# Altium PCB PE_CAM_EZ_Bridge.PcbDoc
Units mm, origin at the board's own origin, x right, y up, seen from the top; angles counter-clockwise.
Board outline 56 x 59.87 mm, 2 copper layers (Top Layer, Bottom Layer), stack 1.671 mm thick; 31 components, 35 nets, 226 pads, 470 vias.
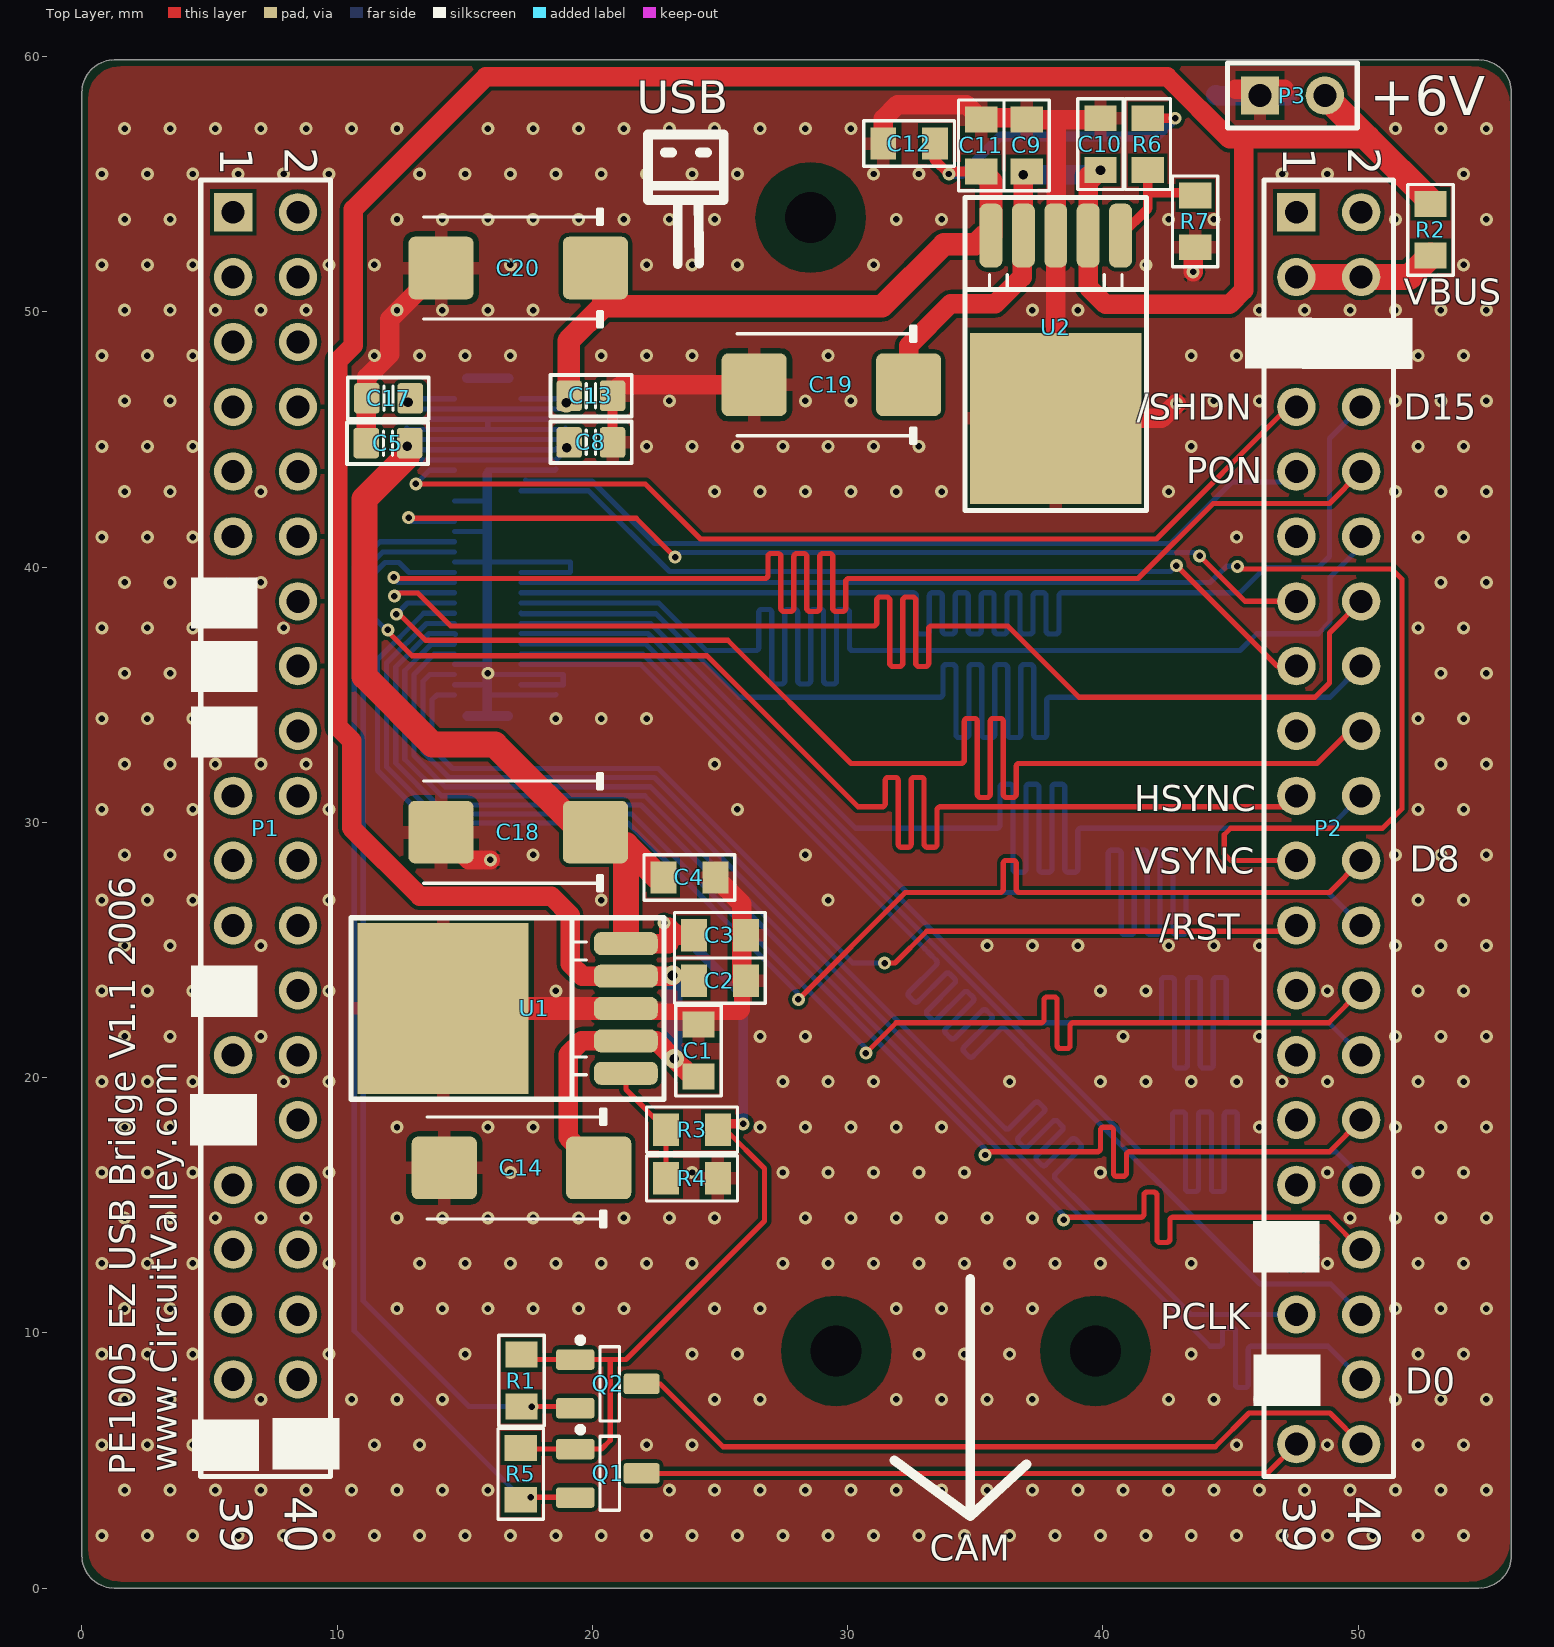
[diagram p0: Top Layer view]
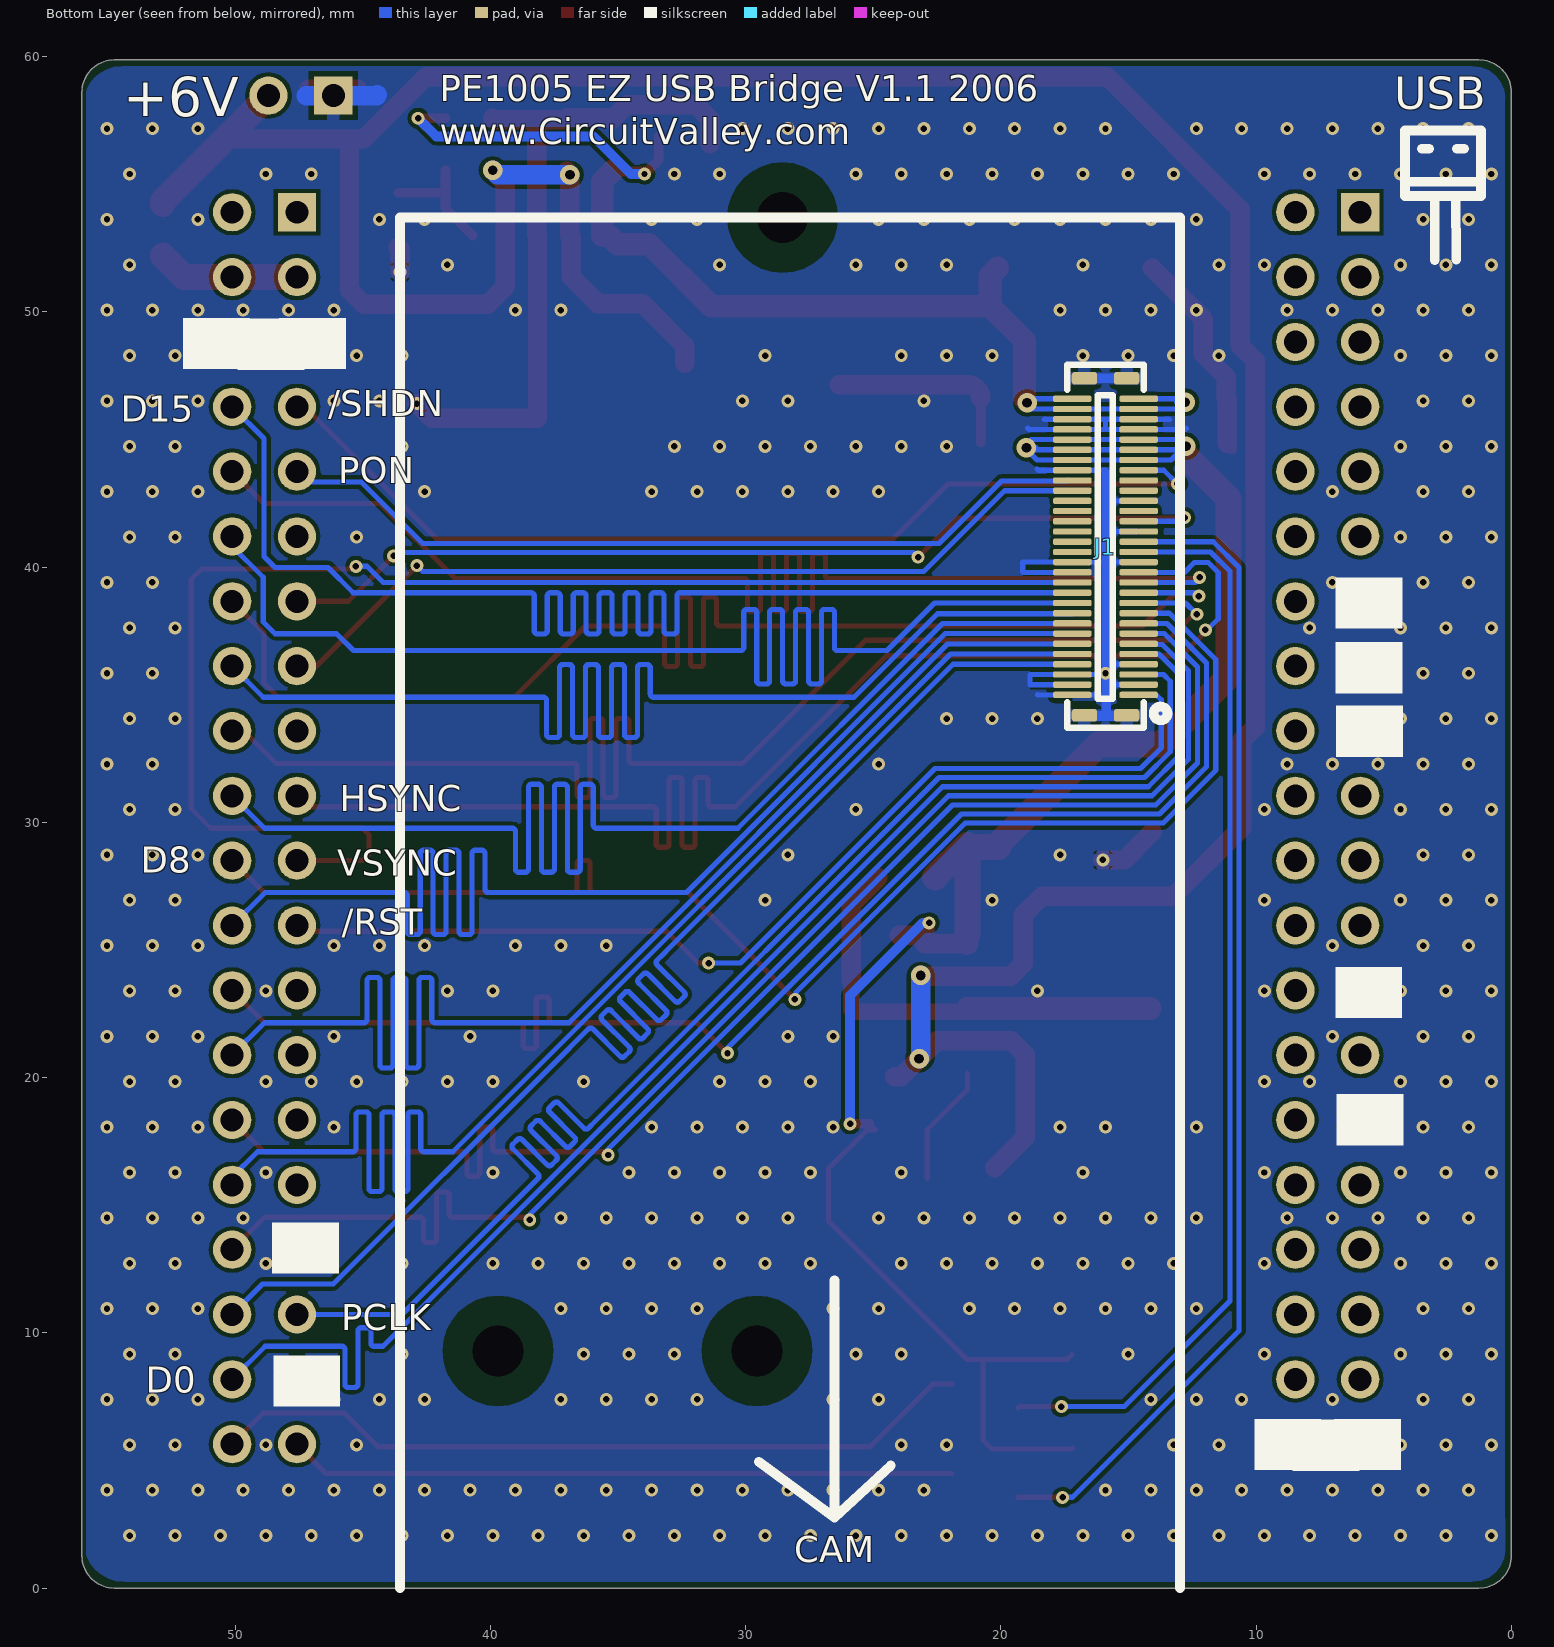
[diagram p1: Bottom Layer view, seen from below]

## Layer stack, top to bottom
Top Solder: solder mask 0.0102, Solder Resist, Dk 3.5
Top Layer: signal copper 0.0356
Dielectric 1: dielectric 1.6, FR-4, Dk 4.8
Bottom Layer: signal copper 0.0356
Bottom Solder: solder mask 0.0102, Solder Resist, Dk 3.5

## Board outline
0,1.27 0,58.598 cw(c1.27,58.598) 1.27,59.868 54.73,59.868 cw(c54.73,58.598) 56,58.598 56,1.27 cw(c54.73,1.27) 54.73,0 1.27,0 cw(c1.27,1.27)

## Design rules (kind name [scope] priority, off if disabled: settings)
Clearance [All] p1: gap=0.152
MatchedLengths [InNetClass('VID')] p1: tolerance=0.025 checknetsindiffpair=TRUE checkdiffpairvsdiffpair=TRUE checkothers=TRUE
PolygonConnect [All] p1: connectstyle=Relief reliefconductorwidth=0.508 reliefentries=4 polygonreliefangle="90 Angle" airgapwidth=0.203
RoutingVias [All] p1: holewidth=0.254 width=0.508 viastyle="Through Hole" minholewidth=0.254 minwidth=0.508 maxholewidth=1.016 maxwidth=2.54
SolderMaskExpansion [All] p1: expansion=0.102
Width [All] p1: maxlimit=6.35 minlimit=0.152 preferedwidth=0.254
30 further rules are at their usual default settings.

## Classes and differential pairs
net class VID: HSYNC PCLK VSYN YC0 YC1 YC2 YC3 YC4 YC5 YC6 YC7 YC8 YC9 YC10 YC11 YC12 YC13 YC14 YC15

## Components (designator, comment, footprint, x,y, rotation, side; value= is the part's Value field where it differs from the comment)
C1 "1uf" 0805C-TBD 24.155,20.295 r90 top
C2 "1uf" 0805C-TBD 24.232,23.8 r0 top
C3 "1uf" 0805C-TBD 24.232,25.578 r0 top
C4 "1uf" 0805C-TBD 23.038,27.838 r0 top
C5 "100n" CAPC1608N 11.989,44.856 r180 top
C8 "100n" CAPC1608N 19.939,44.882 r0 top
C9 "1uf" 0805C-TBD 37.008,55.753 r90 top
C10 "1uf" 0805C-TBD 39.903,55.804 r90 top
C11 "1uf" 0805C-TBD 35.23,55.753 r90 top
C12 "1uf" 0805C-TBD 33.172,56.591 r180 top
C13 "100n" CAPC1608N 19.939,46.711 r0 top
C14 "33uf 20V D" CAPMP7343X310N 17.221,16.459 r180 top
C17 "100n" CAPC1608N 12.014,46.609 r180 top
C18 "33uf 20V D" CAPMP7343X310N 17.094,29.616 r180 top
C19 "33uf 20V D" CAPMP7343X310N 29.362,47.142 r180 top
C20 "33uf 20V D" CAPMP7343X310N 17.094,51.714 r180 top
J1 "AXT460124" AXT460124 15.9,40.792 r90 bottom
P1 "Header 20X2" HDR2X20 5.925,53.899 r270 top
P2 "Header 20X2" HDR2X20 47.574,53.899 r270 top
P3 "Header 2" HDR1X2 46.152,58.471 r0 top
Q1 "NTR5103NT1G" SOT23-3 20.676,4.496 r0 top
Q2 "NTR5103NT1G" SOT23-3 20.676,8.001 r0 top
R1 "3.2K" 0805R-5K6 17.221,8.89 r270 top
R2 "0R" 0805R-5K6 52.832,52.451 r90 top
R3 "3.3K" 0805R-5K6 23.139,17.958 r0 top
R4 "1.5K" 0805R-5K6 23.139,16.053 r0 top
R5 "3.2K" 0805R-5K6 17.194,3.715 r90 top
R6 "?" 0805R-5K6 41.758,55.804 r90 top
R7 "1K" 0805R-5K6 43.612,54.305 r270 top
U1 "MIC47xxx" "TO-252-5 DPAK 5" 17.501,22.708 r180 top
U2 "MIC47xxx" "TO-252-5 DPAK 5" 38.151,49.174 r270 top

## Footprints (in the part's own frame and the unit in brackets; to place one, negate y for a bottom-side part, rotate by r counter-clockwise, add the part's x,y. Pads: shape width x height; smd on the part's side, far side on the other; paste and mask are expansions set on the pad)
0805C-TBD [mil] "CAPACITOR 0805"
  rect 40x50 smd: 1(-10,0) 2(70,0)
  silkscreen extent -40,-35 100,35, body extent -11,-25 70,25, height 26
0805R-5K6 [mil] "RESISTOR 0805"
  rect 40x50 smd: 1(-10,0) 2(70,0)
  silkscreen extent -40,-35 100,35, body extent -11,-25 70,25, height 27
AXT460124 [mm] "PE Camera Connector Header type"
  rrect50% 0.5x1 smd: 0(-6.6,-0.825) 0(-6.6,0.825) 0(6.6,-0.825) 0(6.6,0.825)
  rrect50% 0.247x1.5 smd: 1(-5.8,-1.3) 2(-5.4,-1.3) 3(-5,-1.3) 4(-4.6,-1.3) 5(-4.2,-1.3) 6(-3.8,-1.3) 7(-3.4,-1.3) 8(-3,-1.3) 9(-2.6,-1.3) 10(-2.2,-1.3) 11(-1.8,-1.3) 12(-1.4,-1.3) 13(-1,-1.3) 14(-0.6,-1.3) 15(-0.2,-1.3) 16(0.2,-1.3) 17(0.6,-1.3) 18(1,-1.3) 19(1.4,-1.3) 20(1.8,-1.3) 21(2.2,-1.3) 22(2.6,-1.3) 23(3,-1.3) 24(3.4,-1.3) 25(3.8,-1.3) 26(4.2,-1.3) 27(4.6,-1.3) 28(5,-1.3) 29(5.4,-1.3) 30(5.8,-1.3) 31(5.8,1.3) 32(5.4,1.3) 33(5,1.3) 34(4.6,1.3) 35(4.2,1.3) 36(3.8,1.3) 37(3.4,1.3) 38(3,1.3) 39(2.6,1.3) 40(2.2,1.3) 41(1.8,1.3) 42(1.4,1.3) 43(1,1.3) 44(0.6,1.3) 45(0.2,1.3) 46(-0.2,1.3) 47(-0.6,1.3) 48(-1,1.3) 49(-1.4,1.3) 50(-1.8,1.3) 51(-2.2,1.3) 52(-2.6,1.3) 53(-3,1.3) 54(-3.4,1.3) 55(-3.8,1.3) 56(-4.2,1.3) 57(-4.6,1.3) 58(-5,1.3) 59(-5.4,1.3) 60(-5.8,1.3)
  silkscreen extent -7.09,-2.43 7.14,1.5, body extent -6.95,-1.17 6.95,1.17, height 1.24
CAPC1608N [mm] "Chip Capacitor, Body 1.6x0.8mm, 0603, IPC Medium Density"
  round 0.254 on Mech14: 0(0,0)
  rrect25% 1x1.2 smd: 1(-0.85,0) 2(0.85,0)
  Top Layer pour cut-out: -0.4,0.6 0.4,0.6 0.4,-0.6 -0.4,-0.6
  silkscreen extent -1.57,-0.81 1.6,0.81, body extent -0.85,-0.45 0.85,0.45, height 0.89
CAPMP7343X310N [mm] "Molded body capacitor, Body 7.3x4.3mm, 2917, IPC Nominal settings"
  round 1 on Mech14: 0(0,0)
  rrect20% 2.55x2.45 smd: 1(-3.025,0) 2(3.025,0)
  silkscreen extent -3.3,-2.3 3.7,2.3, body extent -3.8,-1.97 3.8,1.98, height 3.1
HDR1X2 [mm] "Connector; Header; 2 Position"
  rect 1.5x1.5 hole 0.9: 1(0,0)
  round 1.5 hole 0.9: 2(2.54,0)
  silkscreen extent -1.27,-1.27 3.81,1.27
HDR2X20 [mm] "Connector; Header; 20x2 Position"
  rect 1.5x1.5 hole 0.9: 1(0,0)
  round 1.5 hole 0.9: 2(0,2.54) 3(2.54,0) 4(2.54,2.54) 5(5.08,0) 6(5.08,2.54) 7(7.62,0) 8(7.62,2.54) 9(10.16,0) 10(10.16,2.54) 11(12.7,0) 12(12.7,2.54) 13(15.24,0) 14(15.24,2.54) 15(17.78,0) 16(17.78,2.54) 17(20.32,0) 18(20.32,2.54) 19(22.86,0) 20(22.86,2.54) 21(25.4,0) 22(25.4,2.54) 23(27.94,0) 24(27.94,2.54) 25(30.48,0) 26(30.48,2.54) 27(33.02,0) 28(33.02,2.54) 29(35.56,0) 30(35.56,2.54) 31(38.1,0) 32(38.1,2.54) 33(40.64,0) 34(40.64,2.54) 35(43.18,0) 36(43.18,2.54) 37(45.72,0) 38(45.72,2.54) 39(48.26,0) 40(48.26,2.54)
  silkscreen extent -1.27,-1.27 49.53,3.81
SOT23-3 [mm]
  round 0.5 on Mech14: 0(0,0)
  rrect25% 1.5x0.8 smd: 1(-1.35,0.95) 2(-1.35,-0.95)
  rrect25% 1.4x0.8 smd: 3(1.25,0)
  silkscreen extent -1.25,-1.45 0.38,1.81, body extent -1.4,-1.45 1.4,1.45, height 1.29
"TO-252-5 DPAK 5" [mm] "MIC47300"
  rrect60% 2.5x0.9 smd: 1(-3.81,2.54) 2(-3.81,1.27) 3(-3.81,0) 4(-3.81,-1.27) 5(-3.81,-2.54)
  rect 6.7x6.7 smd: 3(3.353,0)
  silkscreen extent -5.31,-3.56 6.96,3.56, body extent -4.24,-3.32 6.06,3.38, height 2.41

## Part data
C1 C2 C3 C4 C9 C10 C11 C12: library part 0805C-TBD, "CAPACITOR 0805 CERAMIC VALUE TO BE DETERMINED"
C5 C8 C13 C17: library part CAPC_10p_0603_NP0_1%_50V, "Capacitor SMD Cer 10pF 5% 50V NP0 0603"
C14 C18 C19 C20: library part CAPT_330u_2917_6V3, "Capacitor SMD Tant 330uF 20% 6V3 2917"
J1: library part "Connector 60 Pin"
P1 P2: "Header, 20-Pin, Dual row"
P3: "Header, 2-Pin"
Q1 Q2: library part MOSFET_BSS123, "MOSFET SMD N-CH 100V 170mA SOT23-3"
R1 R2 R3 R4 R5 R6 R7: library part 0805R-5K6, "RESISTOR 0805 1/4 WATT THIN FILM"
U1 U2: "MIC47xxx Regulator"

## Free pads (board coordinates)
  round 0 hole 2 unplated mask+2: 0(28.55,53.692) 0(29.55,9.292) 0(39.701,9.292)
  round 4 on Keep-Out mask+2: 1(28.55,53.692) 1(29.55,9.292) 1(39.701,9.292)

## Via types
v1: diameter 0.508, hole 0.254, Top Layer to Bottom Layer, tented both sides, 462 vias
v2: diameter 0.762, hole 0.381, Top Layer to Bottom Layer, 8 vias

## Nets (pads, with @x,y where several pads share a name; then routed paths per layer and width w, separated by ;. In a path a pad name is that pad's centre, name@x,y a point inside that pad or via, vN(x,y) a via of type N, cw(c..) or ccw(c..) an arc to the next point about the centre after c; other vN are vias at no path point)
2V8: C3.1 C4.1 C5.1 C8.1 C18.1 J1.24 J1.25 J1.26 J1.35 J1.36 J1.37 Q1.1 Q2.1 R1.1 R3.2 R5.2 U1.5 | length 84.9
  Top Layer w0.203: R5.2 17.241,5.446 Q1.1 20.356,5.446 20.701,5.791 20.701,8.915 20.665,8.951 ; R1.1 17.414,8.951 Q2.1 20.665,8.951 ; R3.2@25.146,18.186 R3.2 25.222,17.958 26.746,16.434 26.746,14.376 21.321,8.951 20.665,8.951
  Top Layer w0.381: R3.2@25.146,18.186 v1(25.908,18.186)
  Top Layer w0.762: U1.5 22.987,25.248 22.987,25.883 23.292,25.578 C3.1
  Top Layer w0.889: U1.5 U1.5@21.311,25.603
  Top Layer w1.016: C5.1@12.737,44.335 11.074,42.672 11.074,35.712 13.741,33.045 16.18,33.045 20.094,29.131 20.094,29.032 21.234,29.032 C18.1@21.311,29.108 ; U1.5@21.311,25.603 C18.1@21.311,29.108 ; C4.1@22.581,27.838 C18.1@21.311,29.108
  Bottom Layer w0.203: v2@12.931,44.592 13.331,44.192 J1.24 J1.37 18.578,44.192 18.837,44.451 18.635,44.653 18.618,44.67 18.627,44.679 v2(18.999,44.679) ; v2@12.751,44.592 12.751,44.992 J1.26 J1.35 18.821,44.992 18.821,44.653 18.761,44.592 J1.36 J1.25 v2@12.751,44.592
  Bottom Layer w0.381: v1(22.809,26.06) 23.063,26.06 25.908,23.216 v1(25.908,18.186)
  other v2: 12.751,44.729
4V0: C11.1 C12.1 C13.1 C17.1 C20.1 J1.29 J1.30 J1.31 J1.32 R6.2 U2.5 | length 49.2
  Top Layer w0.381: C12.1@33.401,56.871 33.401,55.956 v1(33.96,55.397) 34.061,55.499 C11.1 ; R6.2 42.774,57.582 42.799,57.556 v1(42.824,57.582)
  Top Layer w0.889: C13.1@19.089,46.609 19.075,46.623 19.075,48.87 20.422,50.216 ; C20.1 20.422,51.412 20.422,50.216 ; C11.1 35.611,55.118 U2.5 35.357,52.984 35.014,52.642 33.769,52.642 31.344,50.216 20.422,50.216
  Bottom Layer w0.203: J1.30 12.912,46.592 v2(12.776,46.457) 13.106,46.457 13.005,46.355 13.005,46.192 J1.29 J1.32 18.862,46.192 19.037,46.368 18.813,46.592 J1.31
  Bottom Layer w0.381: v1(33.96,55.397) 34.493,55.397 35.966,56.871 42.113,56.871 v1(42.824,57.582)
  other v2: 18.974,46.431
6V: C1.1 C2.1 C9.1 C10.1 C14.1 C19.1 P3.2 R2.2 U1.2 U1.4 U2.2 U2.4 | length 134.9
  Top Layer w0.762: C14.1 19.05,17.655 19.05,20.904 19.583,21.438 U1.2 22.504,21.438 v2(23.203,20.739) 23.901,20.041 C1.1 ; v2(23.139,24.003) 23.114,23.978 U1.4 19.609,23.978 19.126,24.46 19.126,26.365 18.39,27.102 13.244,27.102 10.566,29.78 10.566,33.198 10.033,33.731 10.033,48.082 10.63,48.679 10.63,54.013 15.824,59.207 42.52,59.207 44.958,56.769 45.517,56.769 ; C19.1@32.385,47.981 32.385,48.664 34.038,50.317 35.789,50.317 36.83,51.359 36.83,52.934 U2.4 v2(36.881,55.372) C9.1 ; C10.1@39.421,55.321 C10.1@39.421,55.067 ; v2(39.903,55.55) C10.1@39.421,55.067 ; 50.355,56.807 50.317,56.769 45.517,56.769 ; C10.1@39.421,55.067 U2.2 39.421,50.978 40.107,50.292 44.958,50.292 45.517,50.851 45.517,56.769
  Top Layer w1.016: P3.2 50.355,56.807 52.832,54.331 R2.2
  Bottom Layer w0.762: v2(23.139,24.003) 23.139,20.803 v2(23.203,20.739) ; v2(36.881,55.372) 39.726,55.372 v2(39.903,55.55)
GND: C1.2 C2.2 C3.2 C4.2 C5.2 C8.2 C9.2 C10.2 C11.2 C12.2 C13.2 C14.2 C17.2 C18.2 C19.2 C20.2 J1.0 J1.2 J1.4 J1.14 J1.17 J1.20 J1.27 J1.28 J1.33 J1.34 J1.38 J1.47 J1.48 J1.58 J1.59 J1.60 P1.13 P1.15 P1.17 P1.25 P1.29 P1.39 P1.40 P2.5 P2.6 P2.33 P2.37 P3.1 R4.2 R7.2 U1.3 U2.3 | length 115.1
  Top Layer w0.381: C5.2@10.936,44.602 C5.2@10.936,44.856 ; C8.2 C13.2@20.789,46.609 ; 24.968,22.555 24.994,22.581
  Top Layer w0.635: U1.3@21.311,22.708 21.438,22.581 24.994,22.581 25.781,22.581 25.857,22.657 C2.2@25.857,23.8
  Top Layer w0.762: C5.2 11.139,46.584 C17.2 11.164,47.435 12.065,48.336 12.065,49.71 C20.2 ; C18.2 15.161,28.524 v1(16.002,28.524) ; C13.2@20.789,46.609 cw(c21.322,46.609) 21.322,47.142 C19.2 ; C4.2 25.857,26.797 C2.2@25.857,23.8 ; C12.2 31.394,57.556 31.953,58.115 34.646,58.115 C11.2 35.306,57.607 C9.2@37.008,57.607 ; C9.2 38.176,57.531 ; C10.2 39.853,57.531 38.176,57.531 ; v1(42.875,46.406) 42.291,45.822 38.151,45.822 38.151,52.984 38.176,53.01 38.176,57.531 ; v1(43.536,51.562) 43.536,52.451 R7.2 ; 45.199,58.725 47.105,58.725
  Top Layer w0.889: U1.3@14.148,22.708 U1.3@21.311,22.708
  Bottom Layer w0.203: 12.725,45.441 12.774,45.392 J1.27 15.9,45.392 ; 13.383,45.784 13.391,45.792 J1.28 15.9,45.792 ; J1.2 15.839,35.392 15.875,35.357 ; J1.4 15.875,36.192 ; J1.14 15.875,40.192 J1.47 19.142,40.192 19.142,39.818 19.117,39.792 J1.48 ; J1.17 15.875,41.392 ; J1.20 15.872,42.592 15.875,42.596 ; 15.875,34.95 15.917,34.992 J1.60 18.559,34.992 18.567,35.001 ; v1@15.875,35.839 15.922,35.792 J1.58 18.843,35.792 18.857,35.778 18.857,35.392 J1.59 ; 15.875,43.637 15.875,43.79 15.878,43.792 J1.38 18.534,43.792 18.578,43.837 ; 18.3,45.775 18.283,45.792 J1.33 15.9,45.792 ; 18.948,45.441 18.9,45.392 J1.34 15.9,45.392 ; 15.9,45.392 15.9,45.792
  Bottom Layer w0.381: J1.0@15.075,47.392 J1.0@16.725,47.392 ; J1.0@15.105,34.163 15.875,34.163 ; 15.875,43.637 15.875,42.596 15.875,40.192 15.875,36.192 15.875,35.839 15.875,35.357 15.875,34.95 15.875,34.163 ; J1.0@16.696,34.163 15.875,34.163
  Bottom Layer w0.762: 44.425,58.496 44.45,58.471 P3.1 47.219,58.471
  other v1: 0.787,2.057 2.565,2.057 4.343,2.057 6.121,2.057 7.899,2.057 9.677,2.057 11.455,2.057 13.233,2.057 15.011,2.057 16.789,2.057 18.567,2.057 20.345,2.057 22.123,2.057 23.901,2.057 25.679,2.057 27.457,2.057 29.235,2.057 31.013,2.057 32.791,2.057 34.569,2.057 36.347,2.057 38.125,2.057 39.903,2.057 41.681,2.057 43.459,2.057 45.237,2.057 47.015,2.057 48.793,2.057 50.571,2.057 52.349,2.057 54.127,2.057 1.676,3.835 3.454,3.835 5.232,3.835 7.01,3.835 8.788,3.835 10.566,3.835 12.344,3.835 14.122,3.835 15.9,3.835 23.012,3.835 24.79,3.835 26.568,3.835 28.346,3.835 30.124,3.835 31.902,3.835 33.68,3.835 35.458,3.835 37.236,3.835 39.014,3.835 40.792,3.835 42.57,3.835 44.348,3.835 46.126,3.835 47.904,3.835 49.682,3.835 51.46,3.835 53.238,3.835 55.016,3.835 0.787,5.613 2.565,5.613 4.343,5.613 9.677,5.613 11.455,5.613 13.233,5.613 22.123,5.613 23.901,5.613 45.237,5.613 48.793,5.613 52.349,5.613 54.127,5.613 1.676,7.391 3.454,7.391 7.01,7.391 10.566,7.391 12.344,7.391 14.122,7.391 24.79,7.391 26.568,7.391 31.902,7.391 33.68,7.391 35.458,7.391 37.236,7.391 42.57,7.391 44.348,7.391 46.126,7.391 51.46,7.391 53.238,7.391 55.016,7.391 0.787,9.169 2.565,9.169 4.343,9.169 9.677,9.169 15.011,9.169 23.901,9.169 25.679,9.169 32.791,9.169 34.569,9.169 36.347,9.169 43.459,9.169 52.349,9.169 54.127,9.169 1.676,10.947 3.454,10.947 12.344,10.947 14.122,10.947 15.9,10.947 17.678,10.947 19.456,10.947 21.234,10.947 24.79,10.947 26.568,10.947 31.902,10.947 33.68,10.947 35.458,10.947 37.236,10.947 51.46,10.947 53.238,10.947 55.016,10.947 0.787,12.725 2.565,12.725 4.343,12.725 9.677,12.725 13.233,12.725 15.011,12.725 16.789,12.725 18.567,12.725 20.345,12.725 22.123,12.725 23.901,12.725 27.457,12.725 29.235,12.725 31.013,12.725 32.791,12.725 34.569,12.725 36.347,12.725 38.125,12.725 39.903,12.725 43.459,12.725 48.793,12.725 52.349,12.725 54.127,12.725 1.676,14.503 3.454,14.503 5.232,14.503 7.01,14.503 8.788,14.503 12.344,14.503 14.122,14.503 15.9,14.503 17.678,14.503 19.456,14.503 21.234,14.503 23.012,14.503 24.79,14.503 28.346,14.503 30.124,14.503 31.902,14.503 33.68,14.503 35.458,14.503 37.236,14.503 49.682,14.503 51.46,14.503 53.238,14.503 55.016,14.503 0.787,16.281 2.565,16.281 4.343,16.281 9.677,16.281 16.789,16.281 23.901,16.281 27.457,16.281 29.235,16.281 31.013,16.281 32.791,16.281 34.569,16.281 39.903,16.281 48.793,16.281 52.349,16.281 54.127,16.281 1.676,18.059 3.454,18.059 12.344,18.059 15.9,18.059 17.678,18.059 26.568,18.059 28.346,18.059 30.124,18.059 31.902,18.059 33.68,18.059 46.126,18.059 51.46,18.059 53.238,18.059 55.016,18.059 0.787,19.837 2.565,19.837 4.343,19.837 7.899,19.837 9.677,19.837 27.457,19.837 29.235,19.837 31.013,19.837 36.347,19.837 39.903,19.837 41.681,19.837 43.459,19.837 45.237,19.837 47.015,19.837 48.793,19.837 52.349,19.837 54.127,19.837 1.676,21.615 3.454,21.615 7.01,21.615 26.568,21.615 28.346,21.615 40.792,21.615 46.126,21.615 51.46,21.615 53.238,21.615 55.016,21.615 0.787,23.393 2.565,23.393 4.343,23.393 9.677,23.393 18.567,23.393 39.903,23.393 41.681,23.393 48.793,23.393 52.349,23.393 54.127,23.393 1.676,25.171 3.454,25.171 7.01,25.171 35.458,25.171 37.236,25.171 39.014,25.171 42.57,25.171 44.348,25.171 46.126,25.171 51.46,25.171 53.238,25.171 55.016,25.171 0.787,26.949 2.565,26.949 4.343,26.949 9.677,26.949 20.345,26.949 29.235,26.949 52.349,26.949 54.127,26.949 1.676,28.727 3.454,28.727 17.678,28.727 28.346,28.727 51.46,28.727 53.238,28.727 55.016,28.727 0.787,30.505 2.565,30.505 4.343,30.505 9.677,30.505 25.679,30.505 52.349,30.505 54.127,30.505 1.676,32.283 3.454,32.283 5.232,32.283 7.01,32.283 8.788,32.283 24.79,32.283 53.238,32.283 55.016,32.283 0.787,34.061 2.565,34.061 4.343,34.061 18.567,34.061 20.345,34.061 22.123,34.061 52.349,34.061 54.127,34.061 1.676,35.839 3.454,35.839 15.9,35.839 53.238,35.839 55.016,35.839 0.787,37.617 2.565,37.617 4.343,37.617 7.899,37.617 52.349,37.617 54.127,37.617 1.676,39.395 3.454,39.395 7.01,39.395 53.238,39.395 55.016,39.395 0.787,41.173 2.565,41.173 4.343,41.173 45.237,41.173 52.349,41.173 54.127,41.173 1.676,42.951 3.454,42.951 7.01,42.951 24.79,42.951 26.568,42.951 28.346,42.951 30.124,42.951 31.902,42.951 33.68,42.951 42.57,42.951 51.46,42.951 53.238,42.951 55.016,42.951 0.787,44.729 2.565,44.729 4.343,44.729 22.123,44.729 23.901,44.729 25.679,44.729 27.457,44.729 29.235,44.729 31.013,44.729 32.791,44.729 43.459,44.729 52.349,44.729 54.127,44.729 1.676,46.507 3.454,46.507 23.012,46.507 28.346,46.507 30.124,46.507 44.348,46.507 46.126,46.507 51.46,46.507 53.238,46.507 55.016,46.507 0.787,48.285 2.565,48.285 4.343,48.285 11.455,48.285 13.233,48.285 15.011,48.285 16.789,48.285 20.345,48.285 22.123,48.285 23.901,48.285 29.235,48.285 43.459,48.285 45.237,48.285 48.793,48.285 52.349,48.285 54.127,48.285 1.676,50.063 3.454,50.063 5.232,50.063 7.01,50.063 8.788,50.063 12.344,50.063 14.122,50.063 15.9,50.063 17.678,50.063 37.236,50.063 39.014,50.063 46.126,50.063 47.904,50.063 49.682,50.063 51.46,50.063 53.238,50.063 55.016,50.063 0.787,51.841 2.565,51.841 4.343,51.841 9.677,51.841 11.455,51.841 16.789,51.841 22.123,51.841 23.901,51.841 25.679,51.841 31.013,51.841 41.681,51.841 54.127,51.841 1.676,53.619 3.454,53.619 12.344,53.619 14.122,53.619 15.9,53.619 17.678,53.619 19.456,53.619 21.234,53.619 23.012,53.619 24.79,53.619 31.902,53.619 33.68,53.619 42.57,53.619 44.348,53.619 51.46,53.619 55.016,53.619 0.787,55.397 2.565,55.397 4.343,55.397 6.121,55.397 7.899,55.397 9.677,55.397 13.233,55.397 15.011,55.397 16.789,55.397 18.567,55.397 20.345,55.397 22.123,55.397 23.901,55.397 25.679,55.397 31.013,55.397 32.791,55.397 47.015,55.397 48.793,55.397 54.127,55.397 1.676,57.175 3.454,57.175 5.232,57.175 7.01,57.175 8.788,57.175 10.566,57.175 12.344,57.175 15.9,57.175 17.678,57.175 19.456,57.175 21.234,57.175 23.012,57.175 24.79,57.175 26.568,57.175 28.346,57.175 30.124,57.175 51.46,57.175 53.238,57.175 55.016,57.175
HSYNC: J1.13 P2.19 | length 55
  Top Layer w0.203: v1(11.989,37.541) 11.989,37.465 12.929,36.525 24.486,36.525 30.404,30.607 31.217,30.607 31.344,30.607 ccw(c31.344,30.734) 31.471,30.734 31.471,31.635 cw(c31.598,31.635) 31.598,31.762 31.852,31.762 cw(c31.852,31.635) 31.979,31.635 31.979,30.607 31.979,29.148 ccw(c32.106,29.148) 32.106,29.021 32.36,29.021 ccw(c32.36,29.148) 32.487,29.148 32.487,30.607 32.487,31.635 cw(c32.614,31.635) 32.614,31.762 32.868,31.762 cw(c32.868,31.635) 32.995,31.635 32.995,30.607 32.995,29.148 ccw(c33.122,29.148) 33.122,29.021 33.376,29.021 ccw(c33.376,29.148) 33.503,29.148 33.503,30.48 cw(c33.63,30.48) 33.63,30.607 35.331,30.607 47.142,30.607 P2.19
  Bottom Layer w0.203: v1(11.989,37.541) 11.913,37.541 11.481,37.973 11.481,39.787 11.877,40.183 12.421,40.183 12.811,39.792 J1.13
I2C_SCL: P2.40 Q2.3 | length 30.3
  Top Layer w0.203: Q2.3 22.657,8.001 25.121,5.537 44.399,5.537 45.72,6.858 48.895,6.858 P2.40
I2C_SDA: P2.39 Q1.3 | length 26.1
  Top Layer w0.203: Q1.3 46.431,4.496 P2.39
INT_IN: J1.18 P2.13 | length 38.3
  Top Layer w0.203: v1(12.802,41.935) 12.827,41.91 21.717,41.91 v1(23.241,40.386) ; v1(43.79,40.437) 45.568,38.659 P2.13
  Bottom Layer w0.203: v1(12.802,41.935) 12.802,41.827 12.767,41.792 J1.18 ; v1(23.241,40.386) 23.419,40.564 43.663,40.564 v1(43.79,40.437)
INT_OUT: J1.40 P2.15 | length 33.4
  Top Layer w0.203: v1(42.875,40.056) 46.812,36.119 P2.15
  Bottom Layer w0.203: J1.40 19.852,42.992 23.018,39.827 42.647,39.827 v1(42.875,40.056)
NetR3_1: R3.1 R4.1 U1.1 | length 4.8
  Top Layer w0.203: U1.1 21.311,19.533 R3.1 R4.1
NetR6_1: R6.1 R7.1 U2.1 | length 4.9
  Top Layer w0.381: U2.1 41.758,54.051 41.758,54.661 ; R6.1 41.758,54.661 ; R7.1@43.612,54.661 41.758,54.661
PCLK: J1.3 P2.35 | length 56.7
  Bottom Layer w0.203: J1.3 13.628,35.792 13.36,35.525 13.36,32.766 14.376,31.75 22.428,31.75 36.068,18.11 36.158,18.02 ccw(c36.248,18.11) 36.337,18.02 37.322,19.005 cw(c37.412,18.916) 37.502,19.005 37.682,18.826 cw(c37.592,18.736) 37.682,18.646 36.697,17.661 ccw(c36.786,17.571) 36.697,17.482 36.876,17.302 ccw(c36.966,17.392) 37.056,17.302 38.041,18.287 cw(c38.131,18.197) 38.22,18.287 38.4,18.107 cw(c38.31,18.018) 38.4,17.928 37.415,16.943 ccw(c37.505,16.853) 37.415,16.763 37.595,16.584 ccw(c37.684,16.673) 37.774,16.584 38.759,17.569 cw(c38.849,17.479) 38.939,17.569 39.118,17.389 cw(c39.029,17.299) 39.118,17.209 38.133,16.224 ccw(c38.223,16.135) 38.133,16.045 39.408,14.77 43.459,10.719 P2.35
PON: J1.39 P2.9 | length 32.4
  Bottom Layer w0.203: J1.39@17.374,43.415 17.419,43.37 19.978,43.37 22.428,40.919 42.647,40.919 45.06,43.332 47.168,43.332 P2.9
R\S\T\: J1.1 P2.23 | length 40.8
  Top Layer w0.203: v1(31.445,24.486) 31.852,24.486 33.096,25.73 47.346,25.73 P2.23
  Bottom Layer w0.203: J1.1 13.91,34.992 13.716,34.798 13.716,32.913 14.524,32.106 22.575,32.106 30.195,24.486 v1(31.445,24.486)
S\H\D\N\: J1.23 P2.7 | length 39.3
  Top Layer w0.203: v1(13.081,43.256) 22.073,43.256 24.232,41.097 42.093,41.097 47.275,46.279 P2.7
  Bottom Layer w0.203: v1(13.081,43.256) 13.617,43.792 J1.23
SCL_2V8: J1.15 Q2.2 R1.2 | length 42.5
  Top Layer w0.203: v1(17.628,7.112) 19.265,7.112 Q2.2
  Bottom Layer w0.203: J1.15 11.784,40.592 11.024,39.832 11.024,11.252 15.164,7.112 v1(17.628,7.112)
SDA_2V8: J1.16 Q1.2 R5.1 | length 45.6
  Top Layer w0.203: v1(17.577,3.556) 19.315,3.556 Q1.2
  Bottom Layer w0.203: J1.16 11.681,40.992 10.668,39.98 10.668,10.084 17.196,3.556 v1(17.577,3.556)
VBUS: P2.3 P2.4 R2.1 | length 5.6
  Top Layer w1.016: P2.3 P2.4 51.994,51.359 R2.1
VSYN: J1.49 P2.21 | length 55
  Top Layer w0.203: v1(45.263,40.03) 45.364,39.929 51.308,39.929 51.714,39.522 51.714,30.531 50.952,29.769 45.009,29.769 44.755,29.515 44.755,28.753 45.009,28.499 P2.21
  Bottom Layer w0.203: J1.49 44.196,39.392 44.834,40.03 v1(45.263,40.03)
YC0: J1.5 P2.38 | length 56.7
  Bottom Layer w0.203: J1.5 13.804,36.592 13.005,35.793 13.005,32.619 14.229,31.394 22.281,31.394 44.201,9.474 44.425,9.474 44.552,9.474 ccw(c44.552,9.601) 44.679,9.601 44.679,10.072 cw(c44.806,10.072) 44.806,10.199 45.06,10.199 cw(c45.06,10.072) 45.187,10.072 45.187,9.474 45.187,7.988 ccw(c45.314,7.988) 45.314,7.861 45.568,7.861 ccw(c45.568,7.988) 45.695,7.988 45.695,9.347 cw(c45.822,9.347) 45.822,9.474 45.949,9.474 48.819,9.474 P2.38
YC1: J1.57 P2.36 | length 56.7
  Bottom Layer w0.203: J1.57 21.872,36.192 33.02,25.044 33.2,24.865 33.469,24.595 cw(c33.379,24.506) 33.469,24.416 32.403,23.35 ccw(c32.493,23.26) 32.403,23.17 32.583,22.991 ccw(c32.673,23.081) 32.762,22.991 33.828,24.057 cw(c33.918,23.967) 34.008,24.057 34.187,23.877 cw(c34.098,23.787) 34.187,23.697 33.122,22.632 ccw(c33.211,22.542) 33.122,22.452 33.301,22.272 ccw(c33.391,22.362) 33.481,22.272 34.547,23.338 cw(c34.636,23.248) 34.726,23.338 34.906,23.159 cw(c34.816,23.069) 34.906,22.979 33.84,21.913 ccw(c33.93,21.823) 33.84,21.734 34.02,21.554 ccw(c34.109,21.644) 34.199,21.554 35.265,22.62 cw(c35.355,22.53) 35.445,22.62 35.624,22.44 cw(c35.534,22.35) 35.624,22.261 34.558,21.195 ccw(c34.648,21.105) 34.558,21.015 34.738,20.835 ccw(c34.828,20.925) 34.918,20.835 35.983,21.901 cw(c36.073,21.812) 36.163,21.901 37.567,20.498 46.152,11.913 48.92,11.913 P2.36
YC2: J1.6 P2.34 | length 55
  Top Layer w0.203: v1(38.456,14.427) 38.557,14.529 41.351,14.529 41.478,14.529 ccw(c41.478,14.656) 41.605,14.656 41.605,15.39 cw(c41.732,15.39) 41.732,15.517 41.986,15.517 cw(c41.986,15.39) 42.113,15.39 42.113,14.529 42.113,13.668 ccw(c42.24,13.668) 42.24,13.541 42.494,13.541 ccw(c42.494,13.668) 42.621,13.668 42.621,14.402 cw(c42.748,14.402) 42.748,14.529 45.237,14.529 48.844,14.529 P2.34
  Bottom Layer w0.203: J1.6 14.578,36.97 13.678,36.97 12.649,35.941 12.649,32.471 14.082,31.039 22.047,31.039 v1@38.557,14.529
YC3: J1.56 P2.32 | length 56.7
  Bottom Layer w0.203: J1.56 21.975,36.592 41.473,17.094 42.469,17.094 42.596,17.094 ccw(c42.596,17.221) 42.723,17.221 42.723,18.53 cw(c42.85,18.53) 42.85,18.657 43.104,18.657 cw(c43.104,18.53) 43.231,18.53 43.231,17.094 43.231,15.658 ccw(c43.358,15.658) 43.358,15.531 43.612,15.531 ccw(c43.612,15.658) 43.739,15.658 43.739,17.094 43.739,18.53 cw(c43.866,18.53) 43.866,18.657 44.12,18.657 cw(c44.12,18.53) 44.247,18.53 44.247,17.094 44.247,15.658 ccw(c44.374,15.658) 44.374,15.531 44.628,15.531 ccw(c44.628,15.658) 44.755,15.658 44.755,17.094 44.755,18.53 cw(c44.882,18.53) 44.882,18.657 45.136,18.657 cw(c45.136,18.53) 45.263,18.53 45.263,17.221 ccw(c45.39,17.221) 45.39,17.094 45.618,17.094 49.124,17.094 50.114,16.104 P2.32
YC4: J1.7 P2.30 | length 55
  Top Layer w0.203: v1(35.382,16.967) 35.509,17.094 39.649,17.094 39.776,17.094 ccw(c39.776,17.221) 39.903,17.221 39.903,17.929 cw(c40.03,17.929) 40.03,18.056 40.284,18.056 cw(c40.284,17.929) 40.411,17.929 40.411,17.094 40.411,16.26 ccw(c40.538,16.26) 40.538,16.133 40.792,16.133 ccw(c40.792,16.26) 40.919,16.26 40.919,16.967 cw(c41.046,16.967) 41.046,17.094 42.672,17.094 48.87,17.094 P2.30
  Bottom Layer w0.203: J1.7@14.623,37.37 J1.7 13.598,37.392 12.294,36.088 12.294,32.324 13.934,30.683 21.9,30.683 35.382,17.201 v1(35.382,16.967)
YC5: J1.55 P2.28 | length 56.7
  Bottom Layer w0.203: J1.55 17.21,36.982 22.088,36.982 36.921,22.149 42.037,22.149 42.164,22.149 ccw(c42.164,22.276) 42.291,22.276 42.291,23.797 cw(c42.418,23.797) 42.418,23.924 42.672,23.924 cw(c42.672,23.797) 42.799,23.797 42.799,22.149 42.799,20.501 ccw(c42.926,20.501) 42.926,20.374 43.18,20.374 ccw(c43.18,20.501) 43.307,20.501 43.307,22.149 43.307,23.797 cw(c43.434,23.797) 43.434,23.924 43.688,23.924 cw(c43.688,23.797) 43.815,23.797 43.815,22.149 43.815,20.501 ccw(c43.942,20.501) 43.942,20.374 44.196,20.374 ccw(c44.196,20.501) 44.323,20.501 44.323,22.149 44.323,23.797 cw(c44.45,23.797) 44.45,23.924 44.704,23.924 cw(c44.704,23.797) 44.831,23.797 44.831,22.276 ccw(c44.958,22.276) 44.958,22.149 45.847,22.149 48.844,22.149 P2.28
YC6: J1.8 P2.26 | length 55
  Top Layer w0.203: v1(30.709,20.955) 31.902,22.149 37.44,22.149 37.567,22.149 ccw(c37.567,22.276) 37.694,22.276 37.694,23.033 cw(c37.821,23.033) 37.821,23.16 38.075,23.16 cw(c38.075,23.033) 38.202,23.033 38.202,22.149 38.202,21.264 ccw(c38.329,21.264) 38.329,21.137 38.583,21.137 ccw(c38.583,21.264) 38.71,21.264 38.71,22.022 cw(c38.837,22.022) 38.837,22.149 41.326,22.149 48.844,22.149 P2.26
  Bottom Layer w0.203: J1.8 13.495,37.792 11.938,36.235 11.938,32.177 13.787,30.328 21.539,30.328 30.709,21.158 v1(30.709,20.955)
YC7: J1.54 P2.24 | length 56.7
  Bottom Layer w0.203: J1.54 22.181,37.392 32.319,27.254 39.954,27.254 40.081,27.254 ccw(c40.081,27.381) 40.208,27.381 40.208,28.777 cw(c40.335,28.777) 40.335,28.904 40.589,28.904 cw(c40.589,28.777) 40.716,28.777 40.716,27.254 40.716,25.732 ccw(c40.843,25.732) 40.843,25.605 41.097,25.605 ccw(c41.097,25.732) 41.224,25.732 41.224,27.254 41.224,28.777 cw(c41.351,28.777) 41.351,28.904 41.605,28.904 cw(c41.605,28.777) 41.732,28.777 41.732,27.254 41.732,25.732 ccw(c41.859,25.732) 41.859,25.605 42.113,25.605 ccw(c42.113,25.732) 42.24,25.732 42.24,27.254 42.24,28.777 cw(c42.367,28.777) 42.367,28.904 42.621,28.904 cw(c42.621,28.777) 42.748,28.777 42.748,27.254 42.748,25.732 ccw(c42.875,25.732) 42.875,25.605 43.129,25.605 ccw(c43.129,25.732) 43.256,25.732 43.256,27.127 cw(c43.383,27.127) 43.383,27.254 44.653,27.254 48.819,27.254 P2.24
YC8: J1.9 P2.22 | length 55
  Top Layer w0.203: v1(28.067,23.063) 32.258,27.254 35.839,27.254 35.966,27.254 ccw(c35.966,27.381) 36.093,27.381 36.093,28.382 cw(c36.22,28.382) 36.22,28.509 36.474,28.509 cw(c36.474,28.382) 36.601,28.382 36.601,27.381 ccw(c36.728,27.381) 36.728,27.254 39.776,27.254 48.87,27.254 P2.22
  Bottom Layer w0.203: J1.9 13.392,38.192 11.582,36.382 11.582,32.029 13.64,29.972 21.392,29.972 28.019,23.345 28.019,23.111 v1(28.067,23.063)
YC9: J1.53 P2.20 | length 56.7
  Bottom Layer w0.203: J1.53 22.284,37.792 30.307,29.769 35.712,29.769 35.839,29.769 ccw(c35.839,29.896) 35.966,29.896 35.966,31.365 cw(c36.093,31.365) 36.093,31.492 36.347,31.492 cw(c36.347,31.365) 36.474,31.365 36.474,29.769 36.474,28.172 ccw(c36.601,28.172) 36.601,28.045 36.855,28.045 ccw(c36.855,28.172) 36.982,28.172 36.982,29.769 36.982,31.365 cw(c37.109,31.365) 37.109,31.492 37.363,31.492 cw(c37.363,31.365) 37.49,31.365 37.49,29.769 37.49,28.172 ccw(c37.617,28.172) 37.617,28.045 37.871,28.045 ccw(c37.871,28.172) 37.998,28.172 37.998,29.769 37.998,31.365 cw(c38.125,31.365) 38.125,31.492 38.379,31.492 cw(c38.379,31.365) 38.506,31.365 38.506,29.769 38.506,28.172 ccw(c38.633,28.172) 38.633,28.045 38.887,28.045 ccw(c38.887,28.172) 39.014,28.172 39.014,29.642 cw(c39.141,29.642) 39.141,29.769 40.818,29.769 48.844,29.769 P2.20
YC10: J1.10 P2.18 | length 55
  Top Layer w0.203: v1(12.319,38.151) 12.446,38.151 13.462,37.135 25.298,37.135 30.124,32.309 34.315,32.309 34.442,32.309 ccw(c34.442,32.436) 34.569,32.436 34.569,33.946 cw(c34.696,33.946) 34.696,34.073 34.95,34.073 cw(c34.95,33.946) 35.077,33.946 35.077,32.309 35.077,31.103 ccw(c35.204,31.103) 35.204,30.976 35.458,30.976 ccw(c35.458,31.103) 35.585,31.103 35.585,32.309 35.585,33.946 cw(c35.712,33.946) 35.712,34.073 35.966,34.073 cw(c35.966,33.946) 36.093,33.946 36.093,32.309 36.093,31.103 ccw(c36.22,31.103) 36.22,30.976 36.474,30.976 ccw(c36.474,31.103) 36.601,31.103 36.601,32.182 cw(c36.728,32.182) 36.728,32.309 38.684,32.309 48.387,32.309 49.657,33.579 P2.18
  Bottom Layer w0.203: v1(12.319,38.151) 12.761,38.592 J1.10
YC11: J1.52 P2.16 | length 56.7
  Bottom Layer w0.203: J1.52 17.223,38.17 22.485,38.17 25.756,34.9 33.477,34.9 33.604,34.9 ccw(c33.604,35.027) 33.731,35.027 33.731,36.05 cw(c33.858,36.05) 33.858,36.177 34.112,36.177 cw(c34.112,36.05) 34.239,36.05 34.239,34.9 34.239,33.444 ccw(c34.366,33.444) 34.366,33.317 34.62,33.317 ccw(c34.62,33.444) 34.747,33.444 34.747,34.9 34.747,36.05 cw(c34.874,36.05) 34.874,36.177 35.128,36.177 cw(c35.128,36.05) 35.255,36.05 35.255,34.9 35.255,33.444 ccw(c35.382,33.444) 35.382,33.317 35.636,33.317 ccw(c35.636,33.444) 35.763,33.444 35.763,34.9 35.763,36.05 cw(c35.89,36.05) 35.89,36.177 36.144,36.177 cw(c36.144,36.05) 36.271,36.05 36.271,34.9 36.271,33.444 ccw(c36.398,33.444) 36.398,33.317 36.652,33.317 ccw(c36.652,33.444) 36.779,33.444 36.779,34.9 36.779,36.05 cw(c36.906,36.05) 36.906,36.177 37.16,36.177 cw(c37.16,36.05) 37.287,36.05 37.287,34.9 37.287,33.444 ccw(c37.414,33.444) 37.414,33.317 37.668,33.317 ccw(c37.668,33.444) 37.795,33.444 37.795,34.773 cw(c37.922,34.773) 37.922,34.9 41.224,34.9 48.895,34.9 P2.16
YC12: J1.11 P2.14 | length 55
  Top Layer w0.203: v1(12.243,38.862) 12.37,38.989 13.157,38.989 14.453,37.694 30.886,37.694 31.013,37.694 ccw(c31.013,37.821) 31.14,37.821 31.14,38.695 cw(c31.267,38.695) 31.267,38.822 31.521,38.822 cw(c31.521,38.695) 31.648,38.695 31.648,37.694 31.648,36.235 ccw(c31.775,36.235) 31.775,36.108 32.029,36.108 ccw(c32.029,36.235) 32.156,36.235 32.156,37.694 32.156,38.695 cw(c32.283,38.695) 32.283,38.822 32.537,38.822 cw(c32.537,38.695) 32.664,38.695 32.664,37.694 32.664,36.235 ccw(c32.791,36.235) 32.791,36.108 33.045,36.108 ccw(c33.045,36.235) 33.172,36.235 33.172,37.567 cw(c33.299,37.567) 33.299,37.694 34.747,37.694 36.271,37.694 39.065,34.9 48.311,34.9 48.87,35.458 48.87,37.414 P2.14
  Bottom Layer w0.203: v1(12.243,38.862) 12.373,38.992 J1.11
YC13: J1.51 P2.12 | length 56.7
  Bottom Layer w0.203: J1.51 22.596,38.592 24.46,36.728 26.264,36.728 26.391,36.728 ccw(c26.391,36.855) 26.518,36.855 26.518,38.215 cw(c26.645,38.215) 26.645,38.342 26.899,38.342 cw(c26.899,38.215) 27.026,38.215 27.026,36.728 27.026,35.546 ccw(c27.153,35.546) 27.153,35.419 27.407,35.419 ccw(c27.407,35.546) 27.534,35.546 27.534,36.728 27.534,38.215 cw(c27.661,38.215) 27.661,38.342 27.915,38.342 cw(c27.915,38.215) 28.042,38.215 28.042,36.728 28.042,35.546 ccw(c28.169,35.546) 28.169,35.419 28.423,35.419 ccw(c28.423,35.546) 28.55,35.546 28.55,36.728 28.55,38.215 cw(c28.677,38.215) 28.677,38.342 28.931,38.342 cw(c28.931,38.215) 29.058,38.215 29.058,36.728 29.058,35.546 ccw(c29.185,35.546) 29.185,35.419 29.439,35.419 ccw(c29.439,35.546) 29.566,35.546 29.566,36.728 29.566,38.215 cw(c29.693,38.215) 29.693,38.342 29.947,38.342 cw(c29.947,38.215) 30.074,38.215 30.074,36.855 ccw(c30.201,36.855) 30.201,36.728 31.267,36.728 45.364,36.728 46.025,37.389 48.438,37.389 48.895,37.846 48.895,39.599 50.114,40.818 P2.12
YC14: J1.12 P2.10 | length 55
  Top Layer w0.203: v1(12.217,39.599) 12.217,39.548 26.619,39.548 26.746,39.548 ccw(c26.746,39.675) 26.873,39.675 26.873,40.404 cw(c27,40.404) 27,40.531 27.254,40.531 cw(c27.254,40.404) 27.381,40.404 27.381,39.548 27.381,38.387 ccw(c27.508,38.387) 27.508,38.26 27.762,38.26 ccw(c27.762,38.387) 27.889,38.387 27.889,39.548 27.889,40.404 cw(c28.016,40.404) 28.016,40.531 28.27,40.531 cw(c28.27,40.404) 28.397,40.404 28.397,39.548 28.397,38.387 ccw(c28.524,38.387) 28.524,38.26 28.778,38.26 ccw(c28.778,38.387) 28.905,38.387 28.905,39.548 28.905,40.404 cw(c29.032,40.404) 29.032,40.531 29.286,40.531 cw(c29.286,40.404) 29.413,40.404 29.413,39.548 29.413,38.387 ccw(c29.54,38.387) 29.54,38.26 29.794,38.26 ccw(c29.794,38.387) 29.921,38.387 29.921,39.421 cw(c30.048,39.421) 30.048,39.548 33.02,39.548 41.377,39.548 44.323,42.494 48.87,42.494 P2.10
  Bottom Layer w0.203: v1(12.217,39.599) 12.217,39.548 12.373,39.392 J1.12
YC15: J1.50 P2.8 | length 56.7
  Bottom Layer w0.203: J1.50 31.928,38.992 32.182,38.992 32.563,38.992 cw(c32.563,38.865) 32.69,38.865 32.69,37.507 ccw(c32.817,37.507) 32.817,37.38 33.071,37.38 ccw(c33.071,37.507) 33.198,37.507 33.198,38.865 cw(c33.325,38.865) 33.325,38.992 33.579,38.992 cw(c33.579,38.865) 33.706,38.865 33.706,37.507 ccw(c33.833,37.507) 33.833,37.38 34.087,37.38 ccw(c34.087,37.507) 34.214,37.507 34.214,38.865 cw(c34.341,38.865) 34.341,38.992 34.595,38.992 cw(c34.595,38.865) 34.722,38.865 34.722,37.507 ccw(c34.849,37.507) 34.849,37.38 35.103,37.38 ccw(c35.103,37.507) 35.23,37.507 35.23,38.865 cw(c35.357,38.865) 35.357,38.992 35.611,38.992 cw(c35.611,38.865) 35.738,38.865 35.738,37.507 ccw(c35.865,37.507) 35.865,37.38 36.119,37.38 ccw(c36.119,37.507) 36.246,37.507 36.246,38.865 cw(c36.373,38.865) 36.373,38.992 36.627,38.992 cw(c36.627,38.865) 36.754,38.865 36.754,37.507 ccw(c36.881,37.507) 36.881,37.38 37.135,37.38 ccw(c37.135,37.507) 37.262,37.507 37.262,38.865 cw(c37.389,38.865) 37.389,38.992 37.643,38.992 cw(c37.643,38.865) 37.77,38.865 37.77,37.507 ccw(c37.897,37.507) 37.897,37.38 38.151,37.38 ccw(c38.151,37.507) 38.278,37.507 38.278,38.865 cw(c38.405,38.865) 38.405,38.992 41.504,38.992 45.368,38.992 46.355,39.98 48.438,39.98 48.87,40.411 48.87,45.034 P2.8
pads on no net: C5.0 C8.0 C13.0 C14.0 C17.0 C18.0 C19.0 C20.0 J1.19 J1.21 J1.22 J1.41 J1.42 J1.43 J1.44 J1.45 J1.46 P1.1 P1.2 P1.3 P1.4 P1.5 P1.6 P1.7 P1.8 P1.9 P1.10 P1.11 P1.12 P1.14 P1.16 P1.18 P1.19 P1.20 P1.21 P1.22 P1.23 P1.24 P1.26 P1.27 P1.28 P1.30 P1.31 P1.32 P1.33 P1.34 P1.35 P1.36 P1.37 P1.38 P2.1 P2.2 P2.11 P2.17 P2.25 P2.27 P2.29 P2.31 Q1.0 Q2.0

## Polygon pours and split planes (outlines as drawn)
GND on Bottom Layer "Top-GND" (solid, remove dead copper, pour order 4): 5.588,0.254 54.331,0.254 ccw(c54.331,1.854) 55.931,1.854 55.931,3.759 55.931,58.115 ccw(c54.432,58.115) 54.432,59.614 5.004,59.614 1.524,59.614 ccw(c1.524,58.344) 0.254,58.344 0.254,3.962 0.254,1.524 ccw(c1.524,1.524) 1.524,0.254
GND on Top Layer "Top-GND" (solid, remove dead copper, pour order 3): 5.588,0.254 54.331,0.254 ccw(c54.331,1.854) 55.931,1.854 55.931,3.759 55.931,58.115 ccw(c54.432,58.115) 54.432,59.614 5.004,59.614 1.524,59.614 ccw(c1.524,58.344) 0.254,58.344 0.254,3.962 0.254,1.524 ccw(c1.524,1.524) 1.524,0.254

## Other copper
Bottom Layer:
  pour cut-out: 16.586,40.192 16.586,40.056 16.459,40.056 16.459,39.954 16.586,39.954 16.586,39.792 18.11,39.792 18.136,39.649 19.142,39.649 19.142,39.811 19.142,40.192
  pour cut-out: 16.434,35.912 16.434,35.331 16.242,35.331 16.242,35.139 16.434,35.139 16.434,35.001 17.958,35.001 17.958,35.204 18.847,35.204 18.847,35.916

## Silkscreen, mask and mechanical layers (free items; w line width, h text height)
Top Overlay:
  rectangle: 7.468,4.648 10.084,6.655
  rectangle: 4.318,4.597 6.934,6.604
  rectangle: 4.242,17.348 6.858,19.355
  rectangle: 4.267,22.377 6.883,24.384
  rectangle: 4.267,37.592 6.883,39.599
  rectangle: 4.267,35.103 6.883,37.109
  rectangle: 4.267,32.537 6.883,34.544
  rectangle: 45.568,47.777 48.184,49.784
  rectangle: 47.803,47.752 50.419,49.759
  rectangle: 49.505,47.752 52.121,49.759
  rectangle: 45.872,12.37 48.489,14.376
  rectangle: 45.898,7.137 48.514,9.144
  lines w0.381: 22.377,54.94 25.095,54.94 ; 22.835,56.236 23.114,56.236 ; 23.343,51.867 23.343,54.229 ; 24.155,54.381 24.181,51.892 ; 24.206,56.236 24.486,56.236 ; 31.826,5.004 34.798,2.819 ; 34.798,12.116 34.798,2.819 ; 37.008,4.851 34.798,2.819 ; 22.174,54.381 22.2,54.381 25.146,54.381 25.146,56.947 22.174,56.947 22.174,54.381
  text "USB" at 21.742,57.785 h1.27
  text "+6V" at 50.444,57.709 h1.52
  text "VBUS" at 51.791,50.267 h1.02
  text "/SHDN" at 41.326,45.771 h1.02
  text "D15" at 51.791,45.771 h1.02
  text "PON" at 43.256,43.282 h1.02
  text "HSYNC" at 41.224,30.429 h1.02
  text "D8" at 52.019,28.067 h1.02
  text "VSYNC" at 41.25,27.991 h1.02
  text "/RST" at 42.215,25.4 h1.02
  text "PCLK" at 42.24,10.135 h1.02
  text "D0" at 51.841,7.62 h1.02
  text "www.CircuitValley.com" at 3.708,4.547 h1.02 r90
  text "PE1005 EZ USB Bridge V1.1 2006" at 2.083,4.42 h1.02 r90
  text "CAM" at 33.223,1.067 h1.02
Bottom Overlay:
  rectangle: 5.957,4.596 8.573,6.602
  rectangle: 7.456,4.621 10.072,6.628
  rectangle: 4.331,4.621 6.948,6.628
  rectangle: 4.23,17.346 6.846,19.353
  rectangle: 4.281,22.325 6.897,24.331
  rectangle: 4.255,32.561 6.871,34.568
  rectangle: 4.267,35.052 6.883,37.059
  rectangle: 4.267,37.592 6.883,39.599
  rectangle: 49.416,47.75 52.033,49.757
  rectangle: 47.283,47.725 49.899,49.731
  rectangle: 45.657,47.75 48.273,49.757
  rectangle: 45.937,12.317 48.553,14.324
  rectangle: 45.886,7.11 48.502,9.117
  lines w0.381: 1.245,55.093 3.962,55.093 ; 1.854,56.388 2.134,56.388 ; 2.159,52.045 2.184,54.534 ; 2.997,52.019 2.997,54.381 ; 3.226,56.388 3.505,56.388 ; 12.98,0 12.98,53.692 43.536,53.692 43.536,0 ; 24.308,4.801 26.518,2.769 ; 26.518,12.065 26.518,2.769 ; 29.489,4.953 26.518,2.769 ; 1.194,54.534 1.194,57.099 4.166,57.099 4.166,54.534 4.14,54.534 1.194,54.534
  text "PE1005 EZ USB Bridge V1.1 2006" at 41.986,58.242 h1.02
  text "USB" at 4.597,57.937 h1.27
  text "+6V" at 54.381,57.658 h1.52
  text "www.CircuitValley.com" at 41.986,56.566 h1.02
  text "/SHDN" at 46.355,45.898 h1.02
  text "D15" at 54.483,45.695 h1.02
  text "PON" at 45.949,43.282 h1.02
  text "HSYNC" at 45.898,30.429 h1.02
  text "D8" at 53.696,28.016 h1.02
  text "VSYNC" at 45.999,27.915 h1.02
  text "/RST" at 45.822,25.603 h1.02
  text "PCLK" at 45.847,10.109 h1.02
  text "D0" at 53.492,7.645 h1.02
  text "CAM" at 28.092,1.016 h1.02
Mechanical 1:
  lines w0.025: 0,1.27 ccw(c1.27,1.27) 1.27,0 4.064,0 43.586,0 54.73,0 ccw(c54.73,1.27) 56,1.27 56,4.935 56,55.956 56,58.598 ccw(c54.73,58.598) 54.73,59.868 53.696,59.868 2.667,59.868 1.27,59.868 ccw(c1.27,58.598) 0,58.598 0,57.15 0,50.47 0,4.064 0,1.27

## Dimensions
15.9,47.041 to 28.55,53.391 on Mechanical 1
43.536,53.692 to 29.566,9.296 on Mechanical 1
28.55,53.391 to 29.566,9.296 on Mechanical 1
29.566,9.296 to 39.726,9.271 on Mechanical 1
15.9,40.792 to 43.536,53.692 on Mechanical 1

## Text inside footprints (layer, text, board x,y; h text height)
P1: Top Overlay "1" at 5.417,56.439 h1.27 r270; Top Overlay "2" at 7.957,56.439 h1.27 r270; Top Overlay "40" at 7.957,3.607 h1.27 r270; Top Overlay "39" at 5.417,3.607 h1.27 r270
P2: Top Overlay "1" at 47.066,56.439 h1.27 r270; Top Overlay "2" at 49.606,56.439 h1.27 r270; Top Overlay "40" at 49.606,3.607 h1.27 r270; Top Overlay "39" at 47.066,3.607 h1.27 r270